# EAGLE board connectorv4 (EAGLE 5.11)
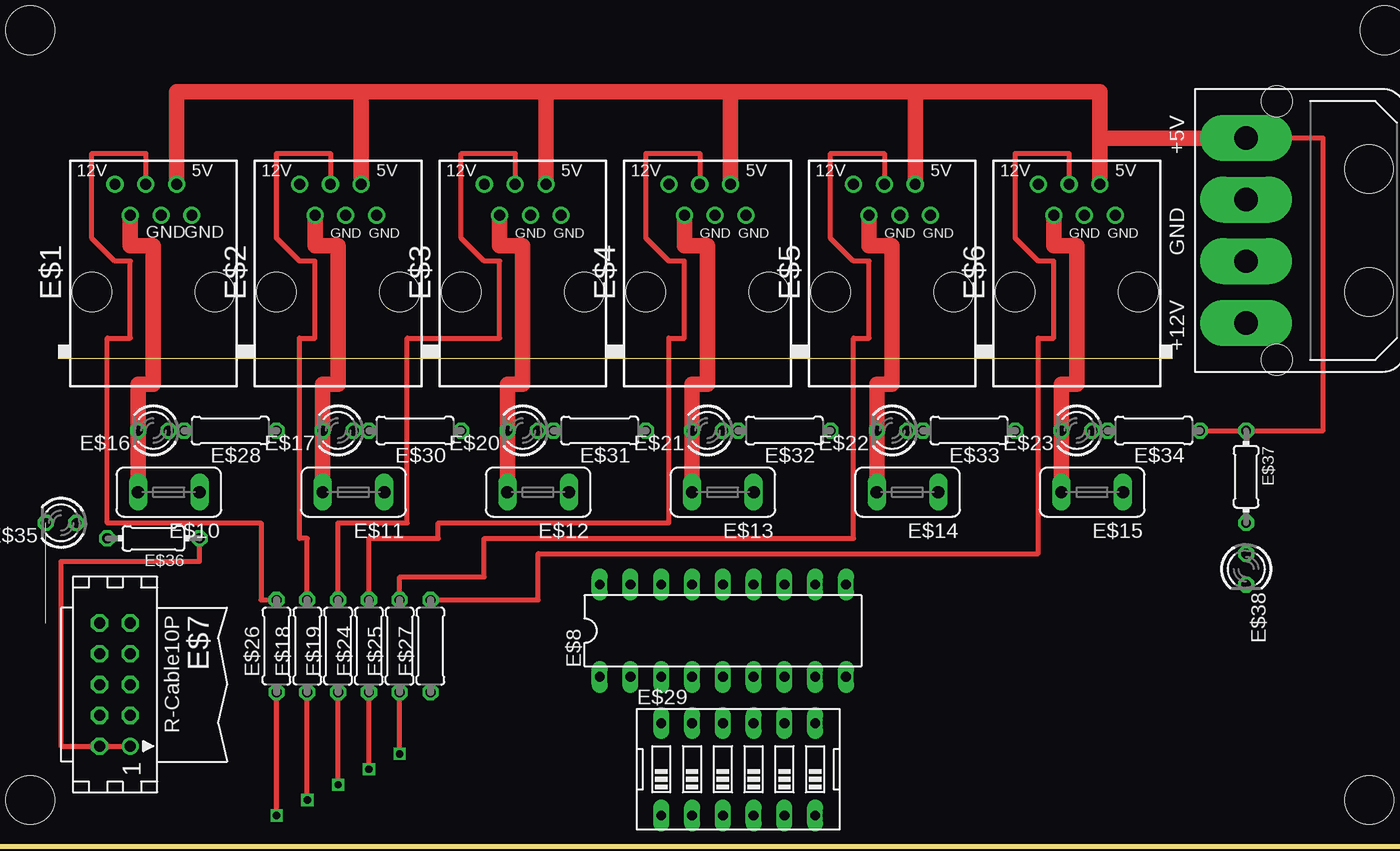
[diagram p0: board, top side]
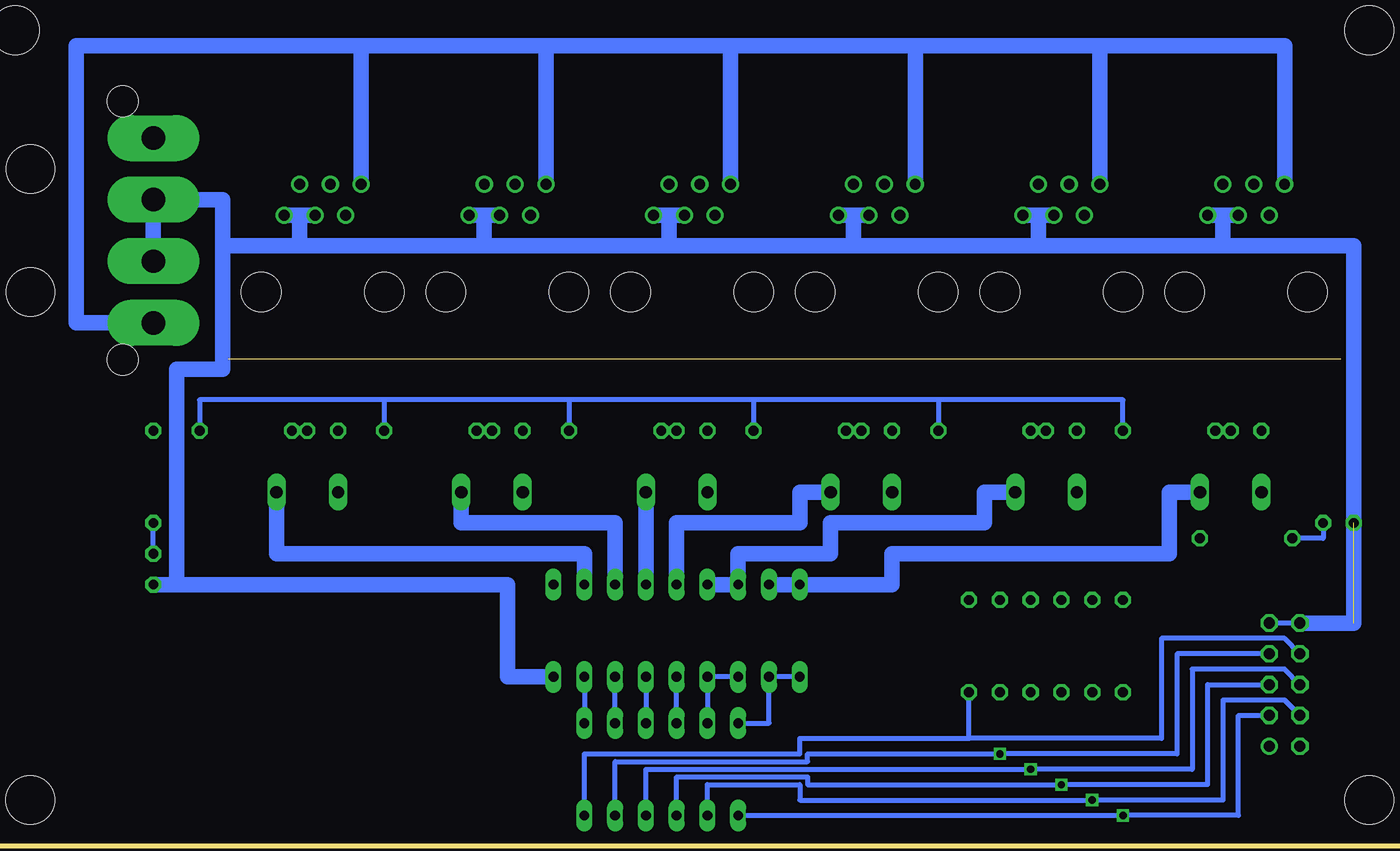
[diagram p1: board, bottom side, seen from below]

Size 91.82 x 0 mm. Coordinates in mm from the lower left corner, seen from the top.
Copper layers (1*16): Top 0.035mm / dielectric 1.5mm / Bottom 0.035mm
Design rules "default": minimum track width 10mil, minimum drill 24mil, track to track 8mil, track to pad 8mil, pad to pad 8mil, via to via 8mil, smd to smd 8mil, copper to edge 40mil, drill to drill 8mil, minimum pad ring 10mil, minimum via ring 8mil, stop-mask expansion 4mil, vias tented up to drill 0mil, thermal gap 10mil
Net classes: 1 Power: width 0.003 mm
Holes 4 mm at 108.14,-36.4 109.41,27.1 -2.35,27.1 -2.35,-36.4
Milling: 4 lines

## Footprints (pad centres in the part's own frame; a part is rotated, then mirrored left to right if it is on the bottom)
RJ11-NO_SHIELD = drill 0.9 pad 1.4 round: 1 -3.175,8.89; 2 -1.905,6.35; 3 -0.635,8.89; 4 0.635,6.35; 5 1.905,8.89; 6 3.175,6.35 | hole 3.251: -5.08,0; 5.08,0
CON10L = drill 0.914 round: 1 5.08,1.27 | drill 0.914 octagon: 2 5.08,-1.27; 3 2.54,1.27; 4 2.54,-1.27; 5 0,1.27; 6 0,-1.27; 7 -2.54,1.27; 8 -2.54,-1.27; 9 -5.08,1.27; 10 -5.08,-1.27
DIL18 = drill 0.813 long: 1 -10.16,-3.81; 2 -7.62,-3.81; 3 -5.08,-3.81; 4 -2.54,-3.81; 5 0,-3.81; 6 2.54,-3.81; 7 5.08,-3.81; 8 7.62,-3.81; 9 10.16,-3.81; 10 10.16,3.81; 11 7.62,3.81; 12 5.08,3.81; 13 2.54,3.81; 14 0,3.81; 15 -2.54,3.81; 16 -5.08,3.81; 17 -7.62,3.81; 18 -10.16,3.81
FLOPPY-4 = drill 1.93 pad 3.81 long: 1 7.62,0; 2 2.54,0; 3 -2.54,0; 4 -7.62,0 | hole 2.54: -10.668,2.54; 10.668,2.54 | hole 3.988: -5.08,10.16; 5.08,10.16
TE5 = drill 1.016 long: 1 -2.54,0; 2 2.54,0
LED3MM = drill 0.813 octagon: A -1.27,0; K 1.27,0
0207/7 = drill 0.813 octagon: 1 -3.81,0; 2 3.81,0
EDG-06 = drill 0.813 long: 1 -6.35,-3.81; 2 -3.81,-3.81; 3 -1.27,-3.81; 4 1.27,-3.81; 5 3.81,-3.81; 6 6.35,-3.81; 7 6.35,3.81; 8 3.81,3.81; 9 1.27,3.81; 10 -1.27,3.81; 11 -3.81,3.81; 12 -6.35,3.81
0204/7 = drill 0.813 octagon: 1 -3.81,0; 2 3.81,0

## Placement (x,y rotation side)
E$1  [RJ11-NO_SHIELD]  7.81,5.51 0 top  (outside the outline)
E$2  [RJ11-NO_SHIELD]  23.05,5.51 0 top  (outside the outline)
E$3  [RJ11-NO_SHIELD]  38.29,5.51 0 top  (outside the outline)
E$4  [RJ11-NO_SHIELD]  53.53,5.51 0 top  (outside the outline)
E$5  [RJ11-NO_SHIELD]  68.77,5.51 0 top  (outside the outline)
E$6  [RJ11-NO_SHIELD]  84.01,5.51 0 top  (outside the outline)
E$7  [CON10L]  4.64,-26.88 270 top  (outside the outline)
E$8  ULN2803a  [DIL18]  54.8,-22.43 0 top  (outside the outline)
E$9  [FLOPPY-4]  97.98,10.59 270 top  (outside the outline)
E$10  Polyswitch 0.9A  [TE5]  9.08,-11 180 top  (outside the outline)
E$11  Polyswitch 0.9A  [TE5]  24.32,-11 180 top  (outside the outline)
E$12  Polyswitch 0.4A  [TE5]  39.56,-11 180 top  (outside the outline)
E$13  Polyswitch 0.4A  [TE5]  54.8,-11 180 top  (outside the outline)
E$14  Polyswitch 0.4A  [TE5]  70.04,-11 180 top  (outside the outline)
E$15  Polyswitch 0.4A  [TE5]  85.28,-11 180 top  (outside the outline)
E$16  [LED3MM]  7.81,-5.92 180 top  (outside the outline)
E$17  [LED3MM]  23.05,-5.92 180 top  (outside the outline)
E$18  1K  [0207/7]  20.51,-23.7 90 top  (outside the outline)
E$19  1K  [0207/7]  23.05,-23.7 90 top  (outside the outline)
E$20  [LED3MM]  38.29,-5.92 180 top  (outside the outline)
E$21  [LED3MM]  53.53,-5.92 180 top  (outside the outline)
E$22  [LED3MM]  68.77,-5.92 180 top  (outside the outline)
E$23  [LED3MM]  84.01,-5.92 180 top  (outside the outline)
E$24  1K  [0207/7]  25.59,-23.7 90 top  (outside the outline)
E$25  1K  [0207/7]  28.13,-23.7 90 top  (outside the outline)
E$26  1K  [0207/7]  17.97,-23.7 90 top  (outside the outline)
E$27  1K  [0207/7]  30.67,-23.7 90 top  (outside the outline)
E$28  1K  [0207/7]  14.16,-5.92 180 top  (outside the outline)
E$29  [EDG-06]  56.07,-33.86 0 top  (outside the outline)
E$30  1K  [0207/7]  29.4,-5.92 180 top  (outside the outline)
E$31  1K  [0207/7]  44.64,-5.92 180 top  (outside the outline)
E$32  1K  [0207/7]  59.88,-5.92 180 top  (outside the outline)
E$33  1K  [0207/7]  75.12,-5.92 180 top  (outside the outline)
E$34  1K  [0207/7]  90.36,-5.92 180 top  (outside the outline)
E$35  [LED3MM]  0.19,-13.54 180 top  (outside the outline)
E$36  1k  [0204/7]  7.81,-14.81 180 top  (outside the outline)
E$37  1k  [0204/7]  97.98,-9.73 270 top  (outside the outline)
E$38  [LED3MM]  97.98,-17.35 270 top  (outside the outline)

## Library data of the parts
E$1-E$6 = con-tycoelectronics
E$7 = con-harting
E$8 = 40xx
E$9 = HARDDISK
E$10-E$15 = fuse
E$16 E$17 E$20-E$23 E$35 E$38 = led
E$18 E$19 E$24-E$28 E$30-E$34 E$36 E$37 = rcl
E$29 = special

## Nets
S$1: E$7.3 E$26.1 E$29.1
S$2: E$7.4 E$18.1 E$29.2
S$3: E$1.4 E$1.6 E$2.4 E$2.6 E$3.4 E$3.6 E$4.4 E$4.6 E$5.4 E$5.6 E$6.4 E$6.6 E$7.9 E$7.10 E$8.9 E$9.2 E$9.3 E$35.K E$38.K
S$4: E$1.3 E$26.2
S$5: E$3.2 E$12.2 E$20.K
S$6: E$7.5 E$19.1 E$29.3
S$7: E$7.6 E$24.1 E$29.4
S$8: E$7.7 E$25.1 E$29.5
S$9: E$7.8 E$27.1 E$29.6
S$10: E$8.17 E$8.18 E$10.1
S$11: E$8.15 E$8.16 E$11.1
S$12: E$1.2 E$10.2 E$16.K
S$13: E$2.2 E$11.2 E$17.K
S$14: E$8.1 E$8.2 E$29.12
S$15: E$4.2 E$13.2 E$21.K
S$16: E$5.2 E$14.2 E$22.K
S$17: E$6.2 E$15.2 E$23.K
S$18: E$8.14 E$12.1
S$19: E$8.13 E$13.1
S$20: E$8.12 E$14.1
S$21: E$8.11 E$15.1
S$22: E$1.1 E$2.1 E$3.1 E$4.1 E$5.1 E$6.1 E$9.1
S$23: E$2.3 E$18.2
S$24: E$3.3 E$19.2
S$25: E$4.3 E$24.2
S$26: E$5.3 E$25.2
S$27: E$6.3 E$27.2
S$28: E$16.A E$28.2
S$29: E$17.A E$30.2
S$30: E$20.A E$31.2
S$31: E$21.A E$32.2
S$32: E$22.A E$33.2
S$33: E$23.A E$34.2
S$34: E$7.1 E$7.2 E$36.1
S$35: E$35.A E$36.2
S$36: E$37.2 E$38.A
S$37 [Power]: E$1.5 E$2.5 E$3.5 E$4.5 E$5.5 E$6.5 E$9.4 E$28.1 E$30.1 E$31.1 E$32.1 E$33.1 E$34.1 E$37.1
S$38: E$8.3 E$8.4 E$29.11
S$39: E$8.5 E$29.10
S$40: E$8.6 E$29.9
S$41: E$8.7 E$29.8
S$42: E$8.8 E$29.7

## Tracks (layer width: path | path; a pad name or v marks a point on that pad's centre or on a via)
S$1  (via drill 0.6)
  Top 0.406: v17.97,-37.67 E$26.1
  Bottom 0.406: E$7.3 8.45,-29.41 8.45,-37.67 v17.97,-37.67 E$29.1
S$2  (via drill 0.6)
  Top 0.406: v20.51,-36.4 E$18.1
  Bottom 0.406: E$7.4 4.64,-28.15 9.72,-28.15 9.72,-36.4 v20.51,-36.4 44.64,-36.4 44.64,-35.13 52.26,-35.13 E$29.2
S$3  (1 unrouted)
  Bottom 0.406: E$7.10 E$7.9
  Bottom 1.27: E$8.9 68.77,-26.24 68.77,-18.62 96.08,-18.62 | 96.08,-18.62 E$38.K | 96.08,-18.62 96.08,-0.84 92.27,-0.84 92.27,9.32 | E$9.2 E$9.3 92.27,13.13 92.27,9.32 | 9.72,9.32 24.96,9.32 | 24.96,9.32 40.2,9.32 | 40.2,9.32 55.44,9.32 | 55.44,9.32 70.68,9.32 | 70.68,9.32 85.92,9.32 | 85.92,9.32 92.27,9.32 | 9.72,11.86 E$1.6 | 9.72,11.86 E$1.4 | 9.72,9.32 9.72,11.86 | 24.96,9.32 24.96,11.86 | 24.96,11.86 E$2.6 | 24.96,11.86 E$2.4 | 40.2,11.86 E$3.6 | 40.2,11.86 E$3.4 | 40.2,9.32 40.2,11.86 | 55.44,11.86 E$4.6 | 55.44,11.86 E$4.4 | 55.44,9.32 55.44,11.86 | 70.68,11.86 E$5.6 | 70.68,11.86 E$5.4 | 70.68,9.32 70.68,11.86 | 85.92,11.86 E$6.4 | 85.92,11.86 E$6.6 | 85.92,9.32 85.92,11.86 | E$7.10 -1.08,-21.8 -1.08,9.32 9.72,9.32
S$4
  Top 0.406: E$1.3 7.18,16.94 2.73,16.94 2.73,9.95 4.64,8.05 5.91,8.05 5.91,1.7 4,1.7 4,-13.54 16.7,-13.54 16.7,-19.89 E$26.2
S$5
  Top 1.27: E$12.2 E$20.K 37.02,-2.11 38.29,-2.11 38.29,9.32 36.39,9.32 E$3.2
S$6  (via drill 0.6)
  Top 0.406: v23.05,-35.13 E$19.1
  Bottom 0.406: E$7.5 10.99,-26.88 10.99,-35.13 v23.05,-35.13 44.01,-35.13 44.01,-34.5 54.8,-34.5 E$29.3
S$7  (via drill 0.6)
  Top 0.406: v25.59,-33.86 E$24.1
  Bottom 0.406: E$7.6 4.64,-25.61 12.26,-25.61 12.26,-33.86 v25.59,-33.86 57.34,-33.86 E$29.4
S$8  (via drill 0.6)
  Top 0.406: v28.13,-32.59 E$25.1
  Bottom 0.406: E$7.7 13.53,-24.34 13.53,-32.59 v28.13,-32.59 44.01,-32.59 44.01,-33.23 59.88,-33.23 E$29.5
S$9
  Bottom 0.406: 30.67,-31.32 E$27.1 | 30.67,-31.32 14.8,-31.32 14.8,-23.07 4.64,-23.07 E$7.8 | E$29.6 62.42,-32.59 44.64,-32.59 44.64,-31.32 30.67,-31.32
S$10
  Bottom 1.27: E$8.17 E$8.18 37.02,-18.62 37.02,-16.08 14.16,-16.08 14.16,-11 E$10.1
S$11
  Bottom 1.27: E$8.15 E$8.16 49.72,-16.08 42.1,-16.08 42.1,-13.54 29.4,-13.54 29.4,-11 E$11.1
S$12
  Top 1.27: E$10.2 E$16.K 6.54,-2.11 7.81,-2.11 7.81,9.32 5.91,9.32 E$1.2
S$13
  Top 1.27: E$11.2 E$17.K 21.78,-2.11 23.05,-2.11 23.05,9.32 21.15,9.32 E$2.2
S$14
  Bottom 0.406: E$8.1 E$8.2 47.18,-30.05 E$29.12
S$15
  Top 1.27: E$13.2 E$21.K 52.26,-2.11 53.53,-2.11 53.53,9.32 51.63,9.32 E$4.2
S$16
  Top 1.27: E$14.2 E$22.K 67.5,-2.11 68.77,-2.11 68.77,9.32 66.87,9.32 E$5.2
S$17
  Top 1.27: E$15.2 E$23.K 82.74,-2.11 84.01,-2.11 84.01,9.32 82.11,9.32 E$6.2
S$18
  Bottom 1.27: E$8.14 54.8,-13.54 44.64,-13.54 44.64,-11 E$12.1
S$19
  Bottom 1.27: E$8.13 E$13.1
S$20
  Bottom 1.27: E$8.12 59.88,-13.54 72.58,-13.54 E$14.1
S$21
  Bottom 1.27: E$8.11 62.42,-16.08 87.82,-16.08 E$15.1
S$22
  Bottom 1.27: E$9.1 104.33,2.97 104.33,25.83 80.84,25.83 | 80.84,25.83 E$6.1 | 65.6,25.83 80.84,25.83 | 65.6,25.83 E$5.1 | 50.36,25.83 65.6,25.83 | 50.36,25.83 E$4.1 | 35.12,25.83 50.36,25.83 | 35.12,25.83 E$3.1 | 19.88,25.83 35.12,25.83 | 19.88,25.83 E$2.1 | 19.88,25.83 4.64,25.83 E$1.1
S$23
  Top 0.406: E$18.2 20.51,-14.81 19.88,-14.81 19.88,1.7 21.15,1.7 21.15,8.05 19.88,8.05 17.97,9.95 17.97,16.94 22.42,16.94 E$2.3
S$24
  Top 0.406: E$3.3 37.66,16.94 33.21,16.94 33.21,9.95 35.12,8.05 36.39,8.05 36.39,1.7 28.77,1.7 28.77,-13.54 23.05,-13.54 E$19.2
S$25
  Top 0.406: E$4.3 52.9,16.94 48.45,16.94 48.45,9.95 50.36,8.05 51.63,8.05 51.63,1.7 50.36,1.7 50.36,-13.54 31.31,-13.54 31.31,-14.81 25.59,-14.81 E$24.2
S$26
  Top 0.406: E$5.3 68.14,16.94 63.69,16.94 63.69,9.95 65.6,8.05 66.87,8.05 66.87,1.7 65.6,1.7 65.6,-14.81 35.12,-14.81 35.12,-17.99 28.13,-17.99 E$25.2
S$27
  Top 0.406: E$6.3 83.38,16.94 78.93,16.94 78.93,9.95 80.84,8.05 82.11,8.05 82.11,1.7 80.84,1.7 80.84,-16.08 39.56,-16.08 39.56,-19.89 E$27.2
S$28
  Bottom 0.406: E$16.A E$28.2
S$29
  Bottom 0.406: E$17.A E$30.2
S$30
  Bottom 0.406: E$20.A E$31.2
S$31
  Bottom 0.406: E$21.A E$32.2
S$32
  Bottom 0.406: E$22.A E$33.2
S$33
  Bottom 0.406: E$23.A E$34.2
S$34
  Top 0.406: E$7.1 E$7.2 0.19,-31.96 0.19,-16.72 11.62,-16.72 E$36.1
S$35
  Bottom 0.406: E$36.2 1.46,-14.81 E$35.A
S$36
  Bottom 0.406: E$38.A E$37.2
S$37
  Top 0.406: E$34.1 E$37.1 104.33,-5.92 104.33,18.21 E$9.4
  Top 1.27: E$9.4 85.92,18.21 | 70.68,22.02 85.92,22.02 85.92,18.21 | 70.68,22.02 55.44,22.02 | 55.44,22.02 40.2,22.02 | 40.2,22.02 24.96,22.02 | 24.96,22.02 9.72,22.02 E$1.5 | 24.96,22.02 E$2.5 | 40.2,22.02 E$3.5 | 55.44,22.02 E$4.5 | 70.68,22.02 E$5.5 | 85.92,18.21 E$6.5
  Bottom 0.406: 33.21,-3.38 E$30.1 | 33.21,-3.38 17.97,-3.38 E$28.1 | 48.45,-3.38 E$31.1 | 63.69,-3.38 E$32.1 | 78.93,-3.38 E$33.1 | E$34.1 94.17,-3.38 78.93,-3.38 | 33.21,-3.38 48.45,-3.38 | 48.45,-3.38 63.69,-3.38 | 63.69,-3.38 78.93,-3.38
S$38
  Bottom 0.406: E$8.3 E$8.4 E$29.11
S$39
  Bottom 0.406: E$29.10 E$8.5
S$40
  Bottom 0.406: E$8.6 E$29.9
S$41
  Bottom 0.406: E$29.8 E$8.7
S$42
  Bottom 0.406: E$8.8 E$29.7

## Text on the board
tPlace: 12V | 5V | 12V | 5V | 12V | 5V | 12V | 5V | 12V | 5V | 12V | 5V | GND | GND | GND | GND | GND | GND | GND | GND | GND | GND | GND | GND